# Altium PCB PCB1.pcbdoc
Units mil, origin at the board's own origin, x right, y up, seen from the top; angles counter-clockwise.
Board outline 2715 x 3300 mil, 2 copper layers (Top Layer, Bottom Layer); 53 components, 54 nets, 213 pads, 50 vias.
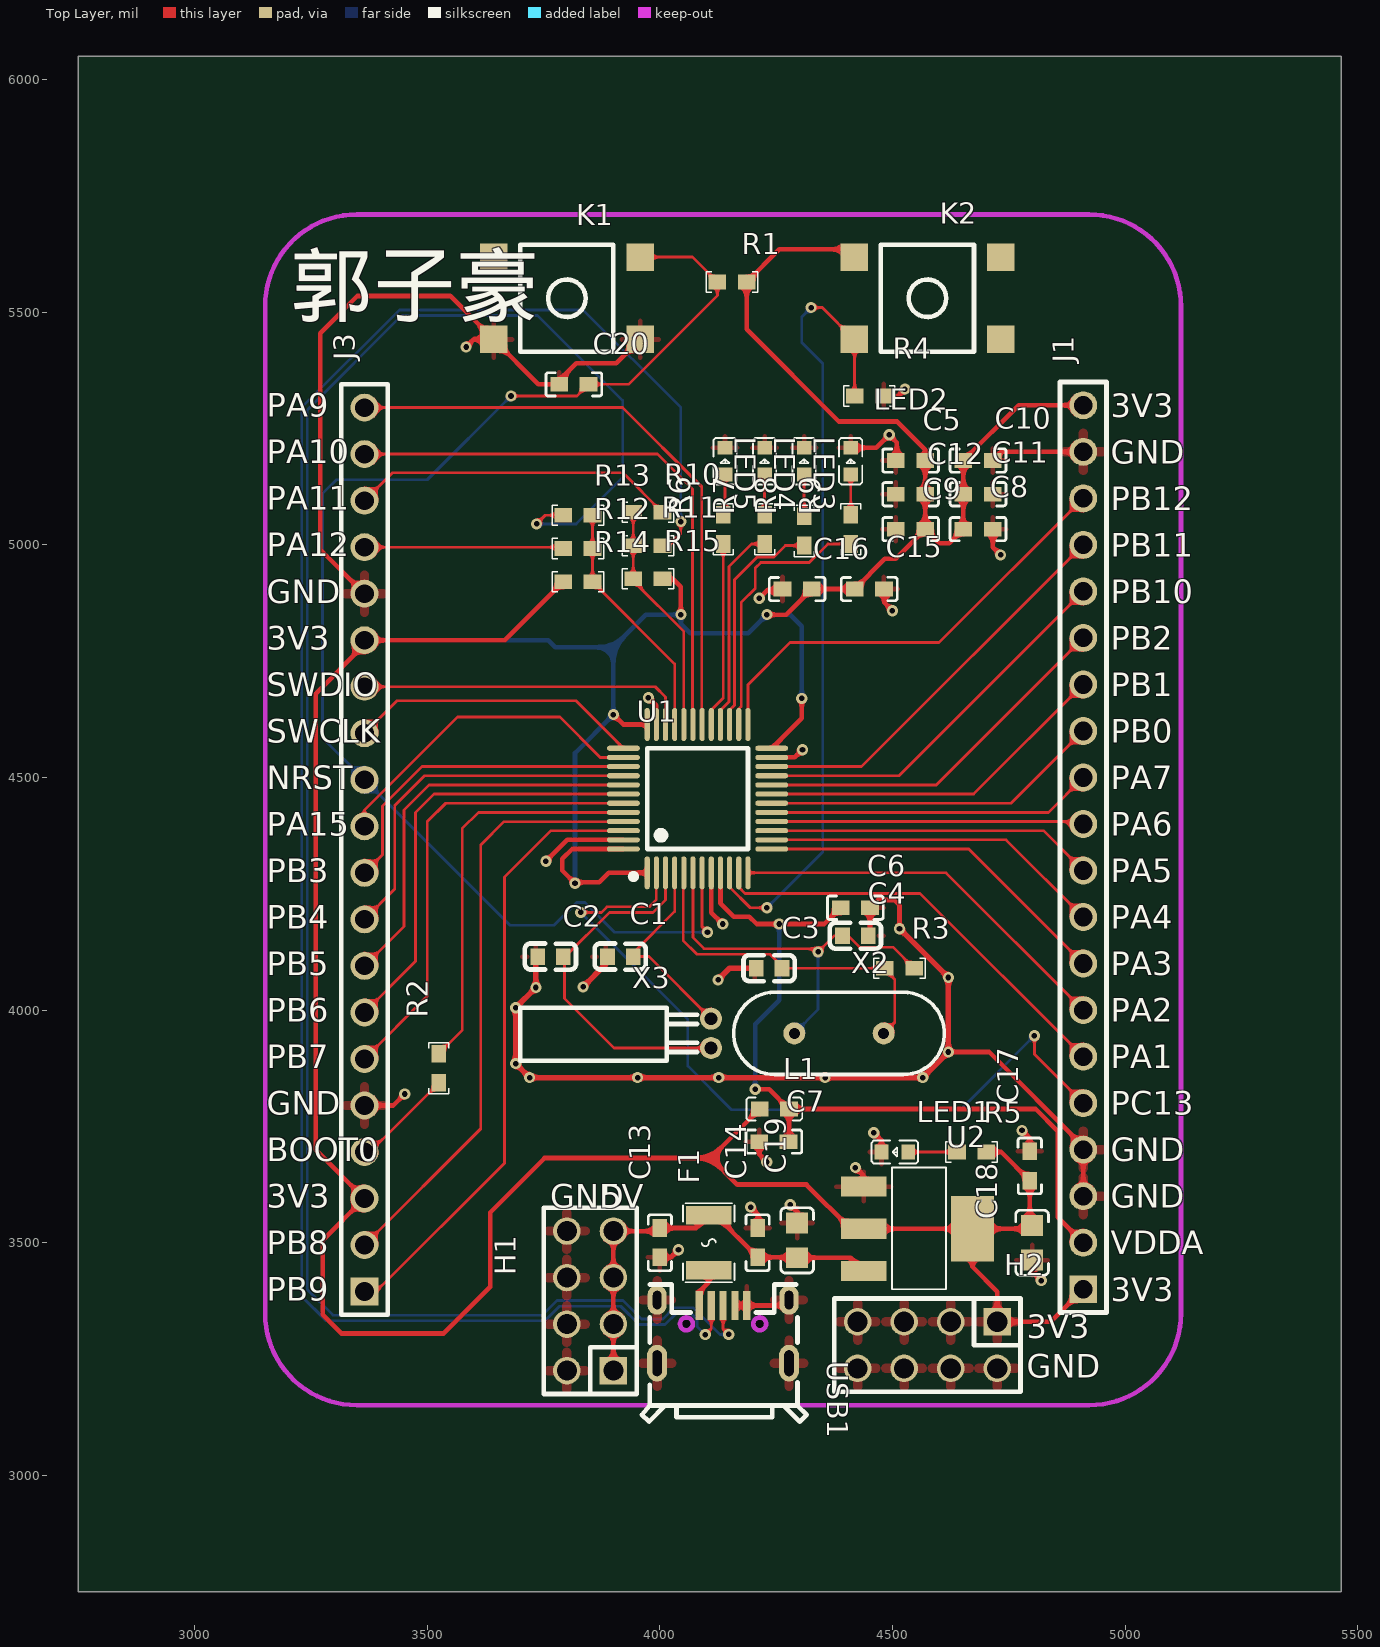
[diagram p0: Top Layer view]
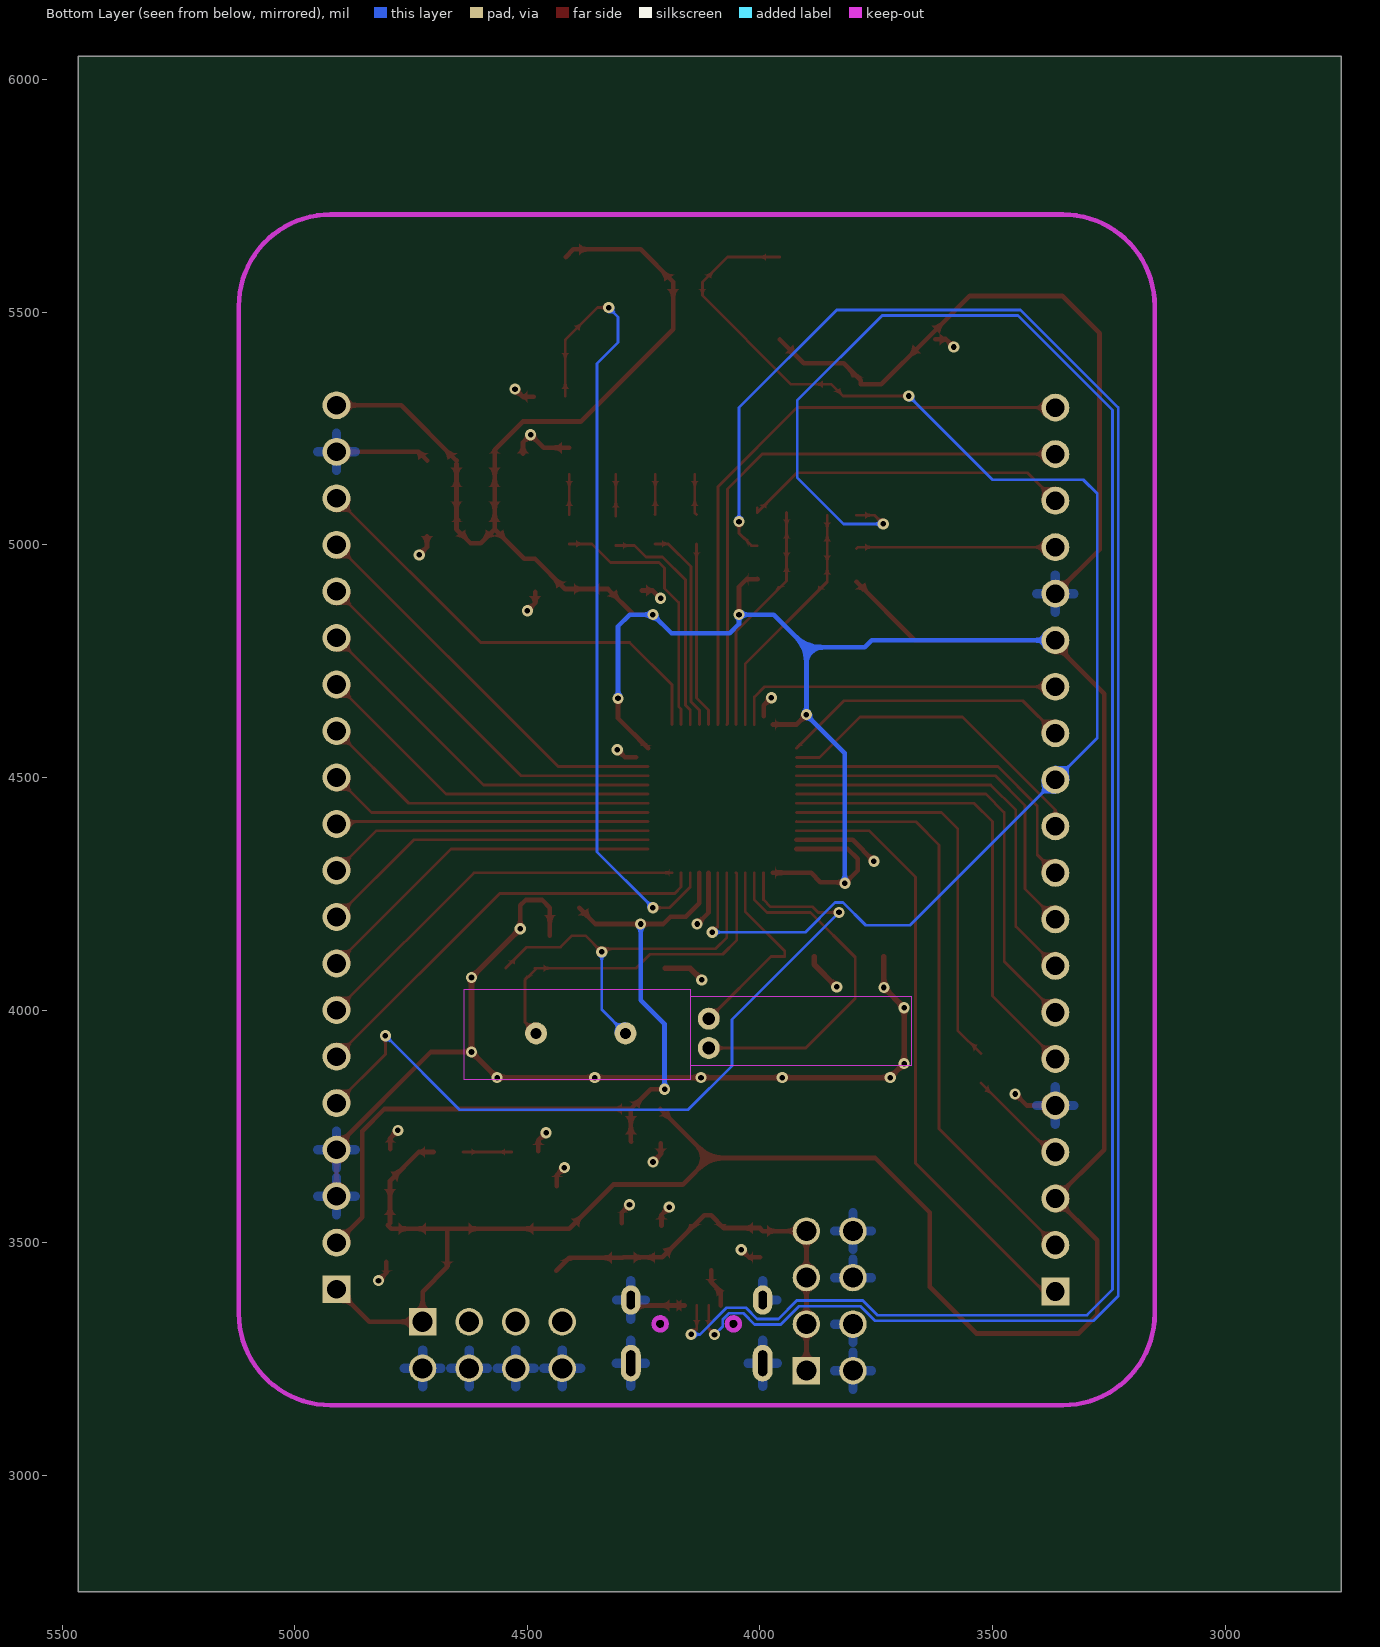
[diagram p1: Bottom Layer view, seen from below]

## Layer stack, top to bottom
Top Layer: signal copper (thickness not stored)
Dielectric: dielectric 12.6, FR-4, Dk 4.8
Bottom Layer: signal copper (thickness not stored)

## Board outline
5465,2750 2750,2750 2750,6050 5465,6050

## Design rules (kind name [scope] priority, off if disabled: settings)
Clearance copperThickness1oz [All] p1: gap=7 ignorepadtopadclearanceinfootprint=FALSE except(6: Track-Track Track-SMDPad SMDPad-SMDPad Track-THPad SMDPad-THPad THPad-THPad Track-Via SMDPad-Via THPad-Via Via-Via SMDPad-Fill THPad-Fill Via-Fill Fill-Fill Track-Region SMDPad-Region THPad-Region Via-Region Region-Region Track-Poly SMDPad-Poly THPad-Poly Via-Poly Fill-Poly Region-Poly Poly-Poly Track-Text SMDPad-Text THPad-Text Via-Text Fill-Text Region-Text Poly-Text Text-Text; 6.9: Track-Hole SMDPad-Hole THPad-Hole Via-Hole Fill-Hole Region-Hole Poly-Hole Text-Hole Sheet-Hole; 11.8: Track-Fill Fill-Region Track-Sheet SMDPad-Sheet THPad-Sheet Via-Sheet Fill-Sheet Region-Sheet Poly-Sheet Text-Sheet)
Clearance copperThickness2oz [All] p1: gap=7 ignorepadtopadclearanceinfootprint=FALSE except(6: Track-SMDPad SMDPad-SMDPad Track-THPad SMDPad-THPad THPad-THPad Track-Via SMDPad-Via THPad-Via Via-Via SMDPad-Fill THPad-Fill Via-Fill Fill-Fill Track-Region SMDPad-Region THPad-Region Via-Region Region-Region Track-Poly SMDPad-Poly THPad-Poly Via-Poly Fill-Poly Region-Poly Poly-Poly Track-Text SMDPad-Text THPad-Text Via-Text Fill-Text Region-Text Poly-Text Text-Text; 6.9: Track-Hole SMDPad-Hole THPad-Hole Via-Hole Fill-Hole Region-Hole Poly-Hole Text-Hole Sheet-Hole; 8: Track-Track; 11.8: Track-Fill Fill-Region Track-Sheet SMDPad-Sheet THPad-Sheet Via-Sheet Fill-Sheet Region-Sheet Poly-Sheet Text-Sheet)
DiffPairsRouting differentialPair [All] p1: maxuncoupledlength=10 maxlimit=6 mostfreqgap=6 toplayer_minwidth=6 toplayer_prefwidth=6 toplayer_maxwidth=6 bottomlayer_minwidth=6 bottomlayer_prefwidth=6 bottomlayer_maxwidth=6
PasteMaskExpansion pasteMaskExpansion [All] p1:
PlaneConnect innerPlane [All] p1: planeconnectstyle=Relief reliefexpansion=20 reliefentries=4 reliefconductorwidth=10 reliefairgap=10
PolygonConnect copperRegion [All] p1: connectstyle=Relief reliefentries=4 reliefconductorwidth=10 polygonreliefangle="90 Angle" airgapwidth=10
RoutingVias viaSize [All] p1: viastyle="Through Hole" holewidth=12 minholewidth=12 maxholewidth=12 width=24 minwidth=24 maxwidth=24
SolderMaskExpansion solderMaskExpansion [All] p1: useseparateexpansions=TRUE expansion=2 expansionbottom=2
Width copperThickness1oz [All] p1: maxlimit=6 minlimit=6 preferedwidth=6
Width copperThickness2oz [All] p1: maxlimit=100 minlimit=8 preferedwidth=10
Width power [All] p1: maxlimit=100 minlimit=5 preferedwidth=10

## Components (designator, comment, footprint, x,y, rotation, side; value= is the part's Value field where it differs from the comment)
C1 "CC0603JRNPO9BN200" C0603#1 3915,4115 r0 top
C2 "CC0603JRNPO9BN200" C0603#1 3765,4115 r0 top
C3 "CC0603JRNPO9BN200" C0603#1 4235,4090 r0 top
C4 "CC0603JRNPO9BN200" C0603#1 4420,4160 r180 top
C5 "CL10A105KB8NNNC" C0603#2 4538.75,5181.25 r0 top
C6 "0603B103K500NT" C0603#2 4420,4220 r180 top
C7 "CL10A105KB8NNNC" C0603#2 4245,3717.31 r0 top
C8 "CL10A105KB8NNNC" C0603#2 4683.75,5033.75 r180 top
C9 "0603B103K500NT" C0603#2 4538.75,5033.75 r0 top
C10 "CL10A105KB8NNNC" C0603#2 4683.75,5181.25 r180 top
C11 "0603B103K500NT" C0603#2 4683.75,5108.75 r180 top
C12 "0603B103K500NT" C0603#2 4538.75,5108.75 r0 top
C13 "CL10A105KB8NNNC" C0603#2 4000,3500 r90 top
C14 "0603B103K500NT" C0603#2 4210,3500 r270 top
C15 "CL10A105KB8NNNC" C0603#2 4450,4905 r180 top
C16 "0603B103K500NT" C0603#2 4295,4905 r0 top
C17 "CAPR500-350X720X850100nF100V" C0603#2 4795,3665 r270 top
C18 "CL21A106KAYNNNE_C15850" C0805 4800,3500 r90 top
C19 "CL21A226MAQNNNE" C0805 4295,3505 r270 top
C20 "CAPR500-350X720X850100nF100V" C0603#2 3815,5345 r0 top
F1 "保险丝" F1210 4105,3500 r90 top
H1 "PZ254V-12-8P" HDR-TH_8P-P2.54-V-M-R2-C4-S2.54 3850,3375 r90 top
H2 "PZ254V-12-8P" HDR-TH_8P-P2.54-V-M-R2-C4-S2.54 4575,3280 r180 top
J1 "J" HDR-TH_20PIN-V-MALE-PITCH2.54 4910,4300 r90 top
J3 "J" HDR-TH_20PIN-V-MALE-PITCH2.54 3365,4295 r90 top
K1 "开关" SW-SMD-T6X6-9.5X5.8 3800,5530 r0 top
K2 "开关" SW-SMD-T6X6-9.5X5.8 4575,5530 r180 top
L1 "3.3uH" L0603 4245.98,3787.44 r0 top
LED1 "LED" LED 4505,3695 r0 top
LED2 "LED" LED 4410,5180 r270 top
LED3 "LED" LED 4310,5180 r270 top
LED4 "LED" LED 4225,5180 r270 top
LED5 "LED" LED 4140,5180 r270 top
R1 "10K" R0603 4155,5565 r0 top
R2 "10K" R0603 3525,3875 r270 top
R3 "1M" R0603 4515,4090 r180 top
R4 "10K" R0603 4450,5320 r180 top
R5 "1K" R0603 4670,3695 r180 top
R6 "1k" R0603 4136.26,5033.45 r90 top
R7 "1k" R0603 4225.61,5033.45 r90 top
R8 "1k" R0603 4310,5030 r90 top
R9 "1k" R0603 4410.06,5033.45 r90 top
R10 "0R" R0603 3974.23,5069.75 r0 top
R11 "NC/22R" R0603 3974.23,4998.27 r0 top
R12 "0R" R0603 3823.74,4992.21 r180 top
R13 "NC/22R" R0603 3823.74,5063.69 r180 top
R14 "NC/1.5k" R0603 3823.74,4920.74 r180 top
R15 "NC/1.5K" R0603 3974.23,4926.8 r0 top
U1 "GD32F103C8T6" TQFP-48_L7.0-W7.0-P0.50-LS9.0-BL 4080.94,4454.53 r0 top
U2 "AMS1117-3.3" SOT-223 4555,3530 r180 top
USB1 "U-F-M5DD-Y-1" U-F-M5DD-Y-1 4135.75,3365 r180 top locked
X2 "8MHz" OSC-49S-1 4385,3950 r0 top
X3 "32.768KHz" DT-38_BD3.1-P0.80 3855,3950 r0 top

## Footprints (in the part's own frame and the unit in brackets; to place one, negate y for a bottom-side part, rotate by r counter-clockwise, add the part's x,y. Pads: shape width x height; smd on the part's side, far side on the other; paste and mask are expansions set on the pad)
C0603#1 [mm]
  rect 0.8x0.9 smd: 1(-0.7,0) 2(0.7,0)
  silkscreen extent -1.41,-0.71 1.39,0.72
C0603#2 [mm]
  rect 0.965x0.8 smd: 1(-0.8,0) 2(0.8,0)
  silkscreen extent -1.52,-0.64 1.52,0.64
C0805 [mm]
  rect 1.14x1.2 smd: 1(-0.95,0) 2(0.95,0)
  silkscreen extent -1.78,-0.89 1.78,0.89
DT-38_BD3.1-P0.80 [mm]
  round 1.2 hole 0.7: 1(6.477,0.8) 2(6.477,-0.8)
  silkscreen extent -3.94,-1.5 5.71,1.4
F1210 [mm]
  rect 1x2.5 smd: 1(-1.5,0) 2(1.5,0)
  silkscreen extent -2.16,-1.4 2.16,1.4
HDR-TH_8P-P2.54-V-M-R2-C4-S2.54 [mm]
  rect 1.5x1.5 hole 1.1: 1(-3.81,-1.27)
  round 1.5 hole 1.1: 2(-3.81,1.27) 3(-1.27,-1.27) 4(-1.27,1.27) 5(1.27,-1.27) 6(1.27,1.27) 7(3.81,-1.27) 8(3.81,1.27)
  silkscreen extent -5.08,-2.54 5.08,2.54
HDR-TH_20PIN-V-MALE-PITCH2.54 [mil]
  rect 60x60 hole 40.16: 1(-900,0)
  round 60 hole 40.16: 2(-800,0) 3(-700,0) 4(-600,0) 5(-500,0) 6(-400,0) 7(-300,0) 8(-200,0) 9(-100,0) 10(0,0) 11(100,0) 12(200,0) 13(300,0) 14(400,0) 15(500,0) 16(600,0) 17(700,0) 18(800,0) 19(900,0) 20(1000,0)
  silkscreen extent -950,-50 1050,50
L0603 [mm]
  rect 0.965x0.8 smd: 1(-0.8,0) 2(0.8,0)
  silkscreen extent -1.52,-0.64 1.52,0.64
LED [mm]
  rect 0.75x0.8 smd: 1(-0.725,0) 2(0.725,0)
  silkscreen extent -1.27,-0.64 1.27,0.64
OSC-49S-1 [mm]
  round 1.2 hole 0.6: 1(-2.44,0) 2(2.44,0)
  silkscreen extent -5.75,-2.25 5.75,2.25
R0603 [mm]
  rect 0.965x0.8 smd: 1(-0.8,0) 2(0.8,0)
  silkscreen extent -1.4,-0.55 1.4,0.55
SOT-223 [mm]
  rect 2.5x1.1 smd: 1(2.97,-2.3) 2(2.97,0) 3(2.97,2.3)
  rect 2.34x3.6 smd: 4(-2.97,0)
  silkscreen extent -1.52,-3.35 1.42,3.3
SW-SMD-T6X6-9.5X5.8 [mm]
  rect 1.5x1.5 smd: 1(-4,2.25) 2(4,2.25) 3(4,-2.25) 4(-4,-2.25)
  silkscreen extent -2.54,-2.92 2.54,2.92
TQFP-48_L7.0-W7.0-P0.50-LS9.0-BL [mm]
  oval 0.28x1.8 smd: 1(-2.75,-4.05) 2(-2.25,-4.05) 3(-1.75,-4.05) 4(-1.25,-4.05) 5(-0.75,-4.05) 6(-0.25,-4.05) 7(0.25,-4.05) 8(0.75,-4.05) 9(1.25,-4.05) 10(1.75,-4.05) 11(2.25,-4.05) 12(2.75,-4.05) 25(2.75,4.05) 26(2.25,4.05) 27(1.75,4.05) 28(1.25,4.05) 29(0.75,4.05) 30(0.25,4.05) 31(-0.25,4.05) 32(-0.75,4.05) 33(-1.25,4.05) 34(-1.75,4.05) 35(-2.25,4.05) 36(-2.75,4.05)
  oval 1.8x0.28 smd: 13(4.05,-2.75) 14(4.05,-2.25) 15(4.05,-1.75) 16(4.05,-1.25) 17(4.05,-0.75) 18(4.05,-0.25) 19(4.05,0.25) 20(4.05,0.75) 21(4.05,1.25) 22(4.05,1.75) 23(4.05,2.25) 24(4.05,2.75) 37(-4.05,2.75) 38(-4.05,2.25) 39(-4.05,1.75) 40(-4.05,1.25) 41(-4.05,0.75) 42(-4.05,0.25) 43(-4.05,-0.25) 44(-4.05,-0.75) 45(-4.05,-1.25) 46(-4.05,-1.75) 47(-4.05,-2.25) 48(-4.05,-2.75)
  silkscreen extent -3.8,-4.55 2.75,2.75
U-F-M5DD-Y-1 [mm]
  rect 0.4x1.6 smd: 1(1.3,0) 2(0.65,0) 3(0,0) 4(-0.65,0) 5(-1.3,0)
  oval 1.05x1.6 hole 0.45 slot 1 at 90 deg: 6(-3.6,-0.3) 8(3.6,-0.3)
  oval 1.09x2 hole 0.5 slot 1.4 at 90 deg: 7(-3.6,3.15) 9(3.6,3.15)
  Multi-Layer board cut-out: 1.65,1 1.698,0.827 1.826,0.7 2,0.654 2.174,0.7 2.302,0.827 2.35,1 2.35,1 2.302,1.173 2.174,1.3 2,1.346 1.826,1.3 1.698,1.173 1.65,1
  Multi-Layer board cut-out: -2.35,1 -2.302,0.826 -2.174,0.7 -2,0.653 -1.826,0.7 -1.698,0.826 -1.65,1 -1.65,1 -1.698,1.174 -1.826,1.3 -2,1.347 -2.174,1.3 -2.302,1.174 -2.35,1
  Multi-Layer keep-out circle w0.254: c2,1 r0.35
  Multi-Layer keep-out circle w0.254: c-2,1 r0.35
  silkscreen extent -4.57,-1.15 4.44,6.35

## Via types
v1: diameter 24, hole 12, Top Layer to Bottom Layer, 50 vias

## Nets (pads, with @x,y where several pads share a name; then routed paths per layer and width w, separated by ;. In a path a pad name is that pad's centre, name@x,y a point inside that pad or via, vN(x,y) a via of type N, cw(c..) or ccw(c..) an arc to the next point about the centre after c; other vN are vias at no path point)
$1N469: LED5.2 R6.2 | length 88.1
  Top Layer w6: R6.2 4140,5068.68 LED5.2
$1N707: LED4.2 R7.2 | length 86.8
  Top Layer w6: LED4.2 4225,5065.55 R7.2
$1N781: LED3.2 R8.2 | length 90
  Top Layer w6: R8.2 LED3.2
$1N855: LED2.2 R9.2 | length 86.5
  Top Layer w6: R9.2@4410,5065 LED2.2
$1N1965: LED1.2 R5.2 | length 105
  Top Layer w6: LED1.2 R5.2
$1N3548: F1.1 USB1.1 | length 84.4
  Top Layer w10: USB1.1 4084.57,3394.34 4105,3414.77 F1.1
$1N6030: R12.1 R13.1 R14.1 U1.33 | length 522.8
  Top Layer w6: R13.1 R12.1 R14.1 4031.73,4744.24 U1.33
$1N6034: R10.1 R11.1 R15.1 U1.32 | length 500.8
  Top Layer w6: R10.1 R11.1 R15.1 3942.73,4922.57 4051.42,4813.89 U1.32
$1N6634: J3.4 R2.2 | length 221.5
  Top Layer w6: J3.4 3376.5,3695 R2.2
BOOT0: R2.1 U1.44 | length 865.2
  Top Layer w6: R2.1 3575,3956.5 3575,4390 3610.01,4425.01 U1.44
D+: R13.2 USB1.3 | length 4243.7
  Top Layer w6: v1(3735,5045) 3753.69,5063.69 R13.2 ; USB1.3 4135.75,3315 v1(4147.87,3302.87)
  Bottom Layer w6: v1(3735,5045) 3820,5045 3920,5145 3920,5310 3737,5493 3445,5493 3242,5290 3242,3399.46 3297.19,3344.26 3747.81,3344.26 3779.07,3375.53 3920.93,3375.53 3960.14,3336.32 4006.31,3336.32 4030.4,3360.41 4071.41,3360.41 4128.95,3302.87 v1(4147.87,3302.87)
D-: R11.2 USB1.2 | length 4243.4
  Top Layer w6: R11.2 4018.27,4998.27 4045,5025 v1(4045,5050) ; v1(4097.58,3302.42) 4110.16,3315 USB1.2
  Bottom Layer w6: v1(4045,5050) 4045,5295 3835,5505 3440.03,5505 3230,5294.97 3230,3385 3282.74,3332.26 3752.78,3332.26 3784.04,3363.53 3915.96,3363.53 3955.17,3324.32 4011.28,3324.32 4035.37,3348.41 4066.44,3348.41 4079.79,3335.07 4079.79,3320.21 v1(4097.58,3302.42)
GND: C1.1 C2.1 C3.1 C4.1 C5.1 C6.1 C7.1 C8.1 C9.1 C10.1 C11.1 C12.1 C13.1 C14.1 C15.1 C16.1 C17.1 C18.1 C19.1 C20.1 H1.2 H1.4 H1.6 H1.8 H2.2 H2.4 H2.6 H2.8 J1.3 J1.4 J1.19 J3.5 J3.16 K1.3 K1.4 LED1.1 LED2.1 LED3.1 LED4.1 LED5.1 R4.1 U1.8 U1.23 U1.35 U1.47 U2.1 USB1.4 USB1.5 USB1.6 USB1.7 USB1.8 USB1.9 | length 5375.8
  Top Layer w10: J3.5 3426.75,3795 v1(3451.5,3819.75) ; J3.16 3270,4990 3270,5455 3350,5535 3548.94,5535 K1.4 3738.94,5345 C20.1 3783.5,5353.5 3820,5390 3906.06,5390 K1.3 ; v1(3583.5,5425.25) 3600,5441.75 K1.4@3623.5,5441.75 ; v1(3755,4320) 3800.95,4365.95 U1.47 ; v1(3975.25,4671.5) 3991.75,4655 U1.35@3991.75,4631.5 ; C13.1 4023.5,3468.5 v1(4040,3485) ; U1.8 4110.47,4209.53 v1(4135,4185) ; USB1.4 USB1.5 4265.67,3365 USB1.6 ; v1(4195.02,3576.5) 4211.52,3560 C14.1@4211.52,3536.5 ; C7.1@4213.25,3713.5 4213.25,3690 v1(4229.75,3673.5) ; v1(4213.5,4885.25) 4230,4901.75 C16.1@4253.5,4901.75 ; U1.23@4266.5,4543.25 4290,4543.25 v1(4306.5,4559.75) ; v1(4280.25,3581.5) 4296.75,3565 C19.1@4296.75,3541.5 ; LED2.1 4464.9,5208.54 v1(4492.86,5236.5) 4509.36,5220 C5.1@4509.36,5196.5 ; v1(4420.25,3661.5) 4436.75,3645 U2.1@4436.75,3621.5 ; C4.1@4451.5,4160 C6.1 4468.15,4236.65 4503.35,4236.65 4515,4225 v1(4515,4175) ; v1(4459.7,3736.5) 4476.19,3720 LED1.1@4476.19,3696.5 ; C15.1@4483.25,4898.5 4483.25,4875 v1(4499.75,4858.5) ; R4.1@4486.5,5318.25 4510,5318.25 v1(4526.5,5334.75) ; v1(4620,3910) 4707.63,3910 4910,3707.63 J1.4 J1.3 ; C10.1 4734,5200 J1.19 ; C8.1@4715.75,5018.5 4715.75,4995 v1(4732.25,4978.5) ; v1(4778.27,3741.5) 4794.76,3725 C17.1@4794.76,3701.5 ; C18.1@4803.25,3458.5 4803.25,3435 v1(4819.75,3418.5)
  Top Layer w12: C2.1@3733.5,4115 v1(3733.5,4048.5) v1(3690,4005) v1(3690,3885) v1(3720,3855) v1(3952.2,3855) v1(4126.67,3855) v1(4355,3855) v1(4565,3855) v1(4620,3910) v1(4620,4070) v1(4515,4175) ; v1(3835,4050) 3883.5,4098.5 C1.1@3883.5,4115 ; v1(4125,4065) 4150,4090 C3.1@4203.5,4090
NRST: C20.2 J3.12 K1.2 R1.1 U1.7 | length 2940.6
  Top Layer w6: v1(3680,5320) 3821.5,5320 C20.2 3932.85,5345 4123.5,5535.66 R1.1 4069.92,5618.58 K1.2 ; U1.7 4090.79,4178.91 v1(4102.35,4167.35)
  Bottom Layer w6: v1(3680,5320) 3500,5140 3305,5140 3275,5110 3275,4585 J3.12 3677.65,4182.35 3772.65,4182.35 3821.3,4231 3838.7,4231 3902.35,4167.35 v1(4102.35,4167.35)
OSC32IN: C2.2 U1.3 X3.2 | length 773.9
  Top Layer w6: U1.3 4012.05,4237.05 3985,4210 3891.5,4210 3795,4113.5 3795,4025 3901.5,3918.5 X3.2
OSC32OUT: C1.2 U1.4 X3.1 | length 434.2
  Top Layer w6: U1.4 4031.73,4211.73 3946.5,4126.5 3946.5,4115 3976.5,4115 X3.1
OSC_IN: C3.2 R3.2 U1.5 X2.2 | length 763.3
  Top Layer w6: U1.5 4050,4293.67 4050,4150 4080,4120 4236.5,4120 4266.5,4090 4479.83,4090 R3.2@4481.67,4088.16 ; X2.2 4505,3973.94 4505,4064.83 R3.2@4481.67,4088.16 ; R3.2 R3.2@4481.67,4088.16
OSC_OUT: 
PA0/WAKEUP: K2.2 R4.2 U1.10 | length 1733.7
  Top Layer w6: U1.10 4149.84,4264.33 4194.17,4220 v1(4230,4220) ; v1@4330,5510 4348.94,5510 K2.2 4418.5,5440.43 R4.2
  Bottom Layer w6: v1(4230,4220) 4350,4340 4350,5390 4305,5435 4305,5490 v1(4325,5510)
PA1: J1.6 U1.11 | length 922.1
  Top Layer w6: U1.11 4169.53,4264.33 4183.2,4250.65 4559.35,4250.65 J1.6
PA2: J1.7 U1.12 | length 843
  Top Layer w6: U1.12 4614.91,4295.09 J1.7
PA3: J1.8 U1.13 | length 771.6
  Top Layer w6: U1.13 4663.73,4346.27 J1.8
PA4: J1.9 U1.14 | length 738.3
  Top Layer w6: U1.14 4744.05,4365.95 J1.9
PA5: J1.10 U1.15 | length 705.1
  Top Layer w6: U1.15 4824.36,4385.64 J1.10
PA6: J1.11 U1.16 | length 671.8
  Top Layer w6: U1.16 4904.68,4405.32 J1.11
PA7: J1.12 U1.17 | length 700.7
  Top Layer w6: U1.17 4835.01,4425.01 J1.12
PA8: R6.1 U1.29 | length 398.6
  Top Layer w6: U1.29 4110.47,4644.74 4136.26,4670.53 R6.1
PA9: J3.20 U1.30 | length 1306.8
  Top Layer w6: J3.20 3920,5295 4090,5125 4090,4614.77 U1.30
PA10: J3.19 U1.31 | length 1242.5
  Top Layer w6: J3.19 3995,5195 4070,5120 4070,4615.08 U1.31
PA11: J3.18 R10.2 | length 710.4
  Top Layer w6: J3.18 3425,5155 3920.47,5155 R10.2 R10.2@4005.72,5079.28
PA12: J3.17 R12.2 | length 428.4
  Top Layer w6: J3.17 3789.46,4995 R12.2
PA15: J3.11 U1.38 | length 710.3
  Top Layer w6: J3.11 3365,4430 3565,4630 3785,4630 3871.88,4543.12 U1.38
PB0: J1.13 U1.18 | length 733.9
  Top Layer w6: U1.18 4754.69,4444.69 J1.13
PB1: J1.14 U1.19 | length 767.2
  Top Layer w6: U1.19 4674.38,4464.38 J1.14
PB2: J1.15 U1.20 | length 800.5
  Top Layer w6: U1.20 4594.06,4484.06 J1.15
PB3: J3.10 U1.39 | length 712.6
  Top Layer w6: J3.10 3404,4334 3404,4439 3488.43,4523.43 U1.39
PB4: J3.9 U1.40 | length 789.8
  Top Layer w6: J3.9 3430,4260 3430,4440 3493.75,4503.75 U1.40
PB5: J3.8 U1.41 | length 864.1
  Top Layer w6: J3.8 3450,4180 3450,4430 3504.06,4484.06 U1.41
PB6: J3.7 U1.42 | length 938.4
  Top Layer w6: J3.7 3475,4105 3475,4425 3514.38,4464.38 U1.42
PB7: J3.6 U1.43 | length 1003.9
  Top Layer w6: J3.6 3500,4030 3500,4405 3539.69,4444.69 U1.43
PB8: J3.2 U1.45 | length 1290.9
  Top Layer w6: J3.2 3615,3745 3615,4355 3665,4405 3921.17,4405 U1.45
PB9: J3.1 U1.46 | length 1327.1
  Top Layer w6: J3.1 3390,3395 3665.76,3670.76 3665.76,4285.76 3765.64,4385.64 U1.46
PB10: J1.16 U1.21 | length 833.7
  Top Layer w6: U1.21 4513.75,4503.75 J1.16
PB11: J1.17 U1.22 | length 867
  Top Layer w6: U1.22 4433.43,4523.43 J1.17
PB12: J1.18 U1.25 | length 972
  Top Layer w6: U1.25 4189.21,4699.21 4280,4790 4600,4790 J1.18
PB13: R9.1 U1.26 | length 577.3
  Top Layer w6: U1.26 4169.53,4647.46 4174.7,4652.63 4174.7,4876.15 4205,4906.45 4205,4950 4216.95,4961.95 4320.92,4961.95 4360.92,5001.95 R9.1
PB14: R8.1 U1.27 | length 495.5
  Top Layer w6: U1.27 4149.84,4644.74 4160.26,4655.16 4160.26,4925 4209.21,4973.95 4245.08,4973.95 4269.63,4998.5 R8.1
PB15: R7.1 U1.28 | length 444.4
  Top Layer w6: U1.28 4130,4614.14 4130,4644.59 4148.26,4662.85 4148.26,4953.26 4196.95,5001.95 R7.1
PC13/TAMPER_RTC: J1.5 U1.2 | length 1695.2
  Top Layer w6: v1(3830,4210) 3874.53,4210 3886.53,4222 3977,4222 3992.36,4237.36 U1.2 ; v1(4805,3945) 4805,3905 J1.5
  Bottom Layer w6: v1(3830,4210) 4060,3980 4060,3880 4154.24,3785.76 4645.76,3785.76 v1(4805,3945)
SWCLK: J3.13 U1.37 | length 627.8
  Top Layer w6: J3.13 3435,4665 3819.3,4665 U1.37
SWDIO: J3.14 U1.34 | length 715.1
  Top Layer w6: J3.14 3990,4695 4012.05,4672.95 U1.34
VCC_3V3: C5.2 C8.2 C9.2 C10.2 C11.2 C12.2 C15.2 C16.2 C17.2 C18.2 H2.1 H2.3 H2.5 H2.7 J1.1 J1.20 J3.3 J3.15 K2.3 L1.1 R1.2 R5.1 R14.2 R15.2 U1.1 U1.24 U1.36 U1.48 U2.2 U2.4 | length 9137.9
  Top Layer w10: R14.2 3792.48,4920.5 3666.98,4795 J3.15 3365,4785 3260,4680 3260,3700 J3.3 3275,3505 3275,3345 3315,3305 3535,3305 3635,3405 3635,3565 3752.07,3682.07 4109.12,3682.07 ; v1(3900,4635) 3921.02,4613.98 U1.36 ; U1.48 3811.27,4346.27 3790,4325 3790,4300 v1(3817.5,4272.5) 3820,4275 3870,4275 3890.09,4295.09 U1.1 ; R15.2 4005,4926.07 4028.93,4926.07 4045,4910 v1(4045,4850) ; L1.1 4109.12,3682.07 ; v1(4230,4850) 4271.5,4850 C16.2 C15.2 4483.5,4970 4506.5,4970 C9.2 ; U1.24 4305,4627.41 v1(4305,4670) ; K2.3 4401.1,5635 4256.5,5635 R1.2 4186.5,5463.5 4385,5265 4510,5265 4570.25,5204.75 C5.2 C12.2 C9.2 ; 4648.77,5053.32 4652.25,5056.81 ; C10.2@4652.25,5173.69 C11.2 4652.25,5056.81 ; C10.2 4771,5300 J1.20 ; R5.1 4733.5,3695 C17.2 4795,3542.4 C18.2 4792.6,3530 U2.4 ; J1.1 4840,3330 H2.1 4725,3395 4671.93,3448.07 U2.4 ; 4109.12,3682.07 4166.19,3625 4315,3625 4410,3530 U2.2 U2.4 ; C9.2 4600.36,5003.63 4622.14,5003.63 C8.2 4652.25,5056.81
  Bottom Layer w10: J3.15 3760,4795 3775,4780 3900,4780 ; v1(3817.5,4272.5) 3817.5,4552.5 v1(3900,4635) 3900,4780 ; v1(4305,4670) 4305,4825 4280,4850 v1(4230,4850) 4190,4810 4065,4810 4045,4830 v1(4045,4850) 3970,4850 3900,4780
VDDA: C6.2 C7.2 J1.2 L1.2 U1.9 | length 1753.5
  Top Layer w10: U1.9 4130.16,4229.84 4159,4201 4192.27,4201 4208.27,4185 v1(4256.36,4185) 4353.5,4185 C6.2 ; v1(4205,3830) 4234.92,3830 L1.2 ; C7.2 4277.48,3718.3 L1.2 ; J1.2 4855,3555 4855,3740 4807.56,3787.44 L1.2
  Bottom Layer w10: v1(4205,3830) 4205,3970 4256.36,4021.36 v1(4256.36,4185)
VIN_5V: C13.2 C14.2 C19.2 F1.2 H1.1 H1.3 H1.5 H1.7 U2.3 | length 901.7
  Top Layer w10: H1.1 H1.3 H1.5 H1.7 3993.5,3525 C13.2 4077.44,3531.5 F1.2 4119.45,3559.06 C14.2 4294.09,3468.5 C19.2 4409.92,3467.6 U2.3
pads on no net: C4.2 K1.1 K2.1 K2.4 R3.1 U1.6 X2.1
copper on no net: | length 867
  Top Layer w6: 4071.1,4295.09 4071.1,4155.9 4095,4132 4333,4132 v1(4340,4125) 4375,4160 4404.02,4160 4428.77,4135.25 4501.24,4135.25 4546.5,4090
  Bottom Layer w6: 4288.94,3950 4340,4001.06 v1(4340,4125)

## Polygon pours and split planes (outlines as drawn)
VCC_3V3 on Top Layer (solid, remove dead copper): 4375,3280 4775,3280 4775,3380 4375,3380
GND on Bottom Layer (solid, remove dead copper, pour order 12): 3000,3000 5215,3000 5215,5795 3000,5795
GND on Top Layer (solid, remove dead copper, pour order 2): 4465.21,5005 4530,5005 4530,5220 4465.21,5220
GND on Top Layer (solid, remove dead copper, pour order 4): 4700,4995 4755,4995 4755,5215 4700,5215
GND on Top Layer (solid, remove dead copper, pour order 6): 4105,5180 4451.35,5180 4451.35,5250 4105,5250
GND on Top Layer (solid, remove dead copper, pour order 8): 4150,3340 4295.75,3340 4295.75,3405 4150,3405
GND on Top Layer (solid, remove dead copper, pour order 10): 3035,3080 5175,3080 5175,5800 3035,5800

## Keep-outs
Bottom Layer:
  region: 3675,3880 4148.83,3880 4148.83,4030 3675,4030
  region: 4150,3850 4635,3850 4635,4045 4150,4045
Board Outline Layer:
  lines w10: 3151.5,3347.8 ccw(c3348.35,3347.8) 3348.35,3150.94 4923.15,3150.94 ccw(c4923.15,3347.8) 5120,3347.8 5120,5513.15 ccw(c4923.15,5513.15) 4923.15,5710 3348.35,5710 ccw(c3348.35,5513.15) 3151.5,5513.15 3151.5,3347.8

## Other copper
Top Layer:
  drawing of 241 lines, arcs and shapes, not listed
Bottom Layer:
  region net NRST: 3396.11,4468.13 3391.87,4463.89 3390.78,4464.74 3389.47,4465.39 3387.95,4465.87 3386.26,4466.18 3382.5,4466.4 3378.39,4466.24 3370.13,4465.42 3366.43,4465.09 3363.33,4465.05 3394.95,4496.67 3394.91,4493.57 3394.58,4489.87 3393.76,4481.61 3393.6,4477.5 3393.82,4473.74 3394.13,4472.05 3394.61,4470.53 3395.26,4469.22
  region net NRST: 3333.89,4521.87 3338.13,4526.11 3339.22,4525.26 3340.53,4524.61 3342.05,4524.13 3343.74,4523.82 3347.5,4523.6 3351.61,4523.76 3359.87,4524.58 3363.57,4524.91 3366.67,4524.95 3335.05,4493.33 3335.09,4496.43 3335.42,4500.13 3336.24,4508.39 3336.4,4512.5 3336.18,4516.26 3335.87,4517.95 3335.39,4519.47 3334.74,4520.78
  region net VCC_3V3: 3406,4800 3406,4790 3403.73,4789.9 3401.76,4789.61 3400.06,4789.14 3398.59,4788.51 3397.31,4787.72 3396.19,4786.8 3394.26,4784.57 3390.54,4779.01 3388.15,4775.88 3386.69,4774.26 3385,4772.64 3385,4817.36 3386.69,4815.74 3388.15,4814.12 3390.54,4810.99 3394.26,4805.43 3396.19,4803.2 3397.31,4802.28 3398.59,4801.49 3400.06,4800.86 3401.76,4800.39 3403.73,4800.1
  region: 4309.64,3974.95 4313.89,3970.71 4312.6,3969.3 4311.63,3967.98 4310.94,3966.74 4310.49,3965.54 4310.26,3964.37 4310.21,3963.22 4310.53,3960.89 4311.9,3955.65 4312.44,3952.45 4312.55,3950.65 4312.52,3948.69 4287.62,3973.59 4289.59,3973.62 4291.39,3973.5 4294.59,3972.97 4299.83,3971.59 4302.16,3971.27 4303.31,3971.32 4304.47,3971.55 4305.67,3972 4306.92,3972.69 4308.24,3973.66
  region: 4343,4108.6 4337,4108.6 4336.87,4110.1 4336.49,4111.33 4335.9,4112.34 4335.14,4113.23 4333.24,4114.91 4331.06,4117 4348.94,4117 4346.76,4114.91 4344.86,4113.23 4344.1,4112.34 4343.51,4111.33 4343.13,4110.1
  region net NRST: 4085.95,4164.35 4085.95,4170.35 4087.45,4170.48 4088.68,4170.86 4089.69,4171.45 4090.57,4172.21 4092.26,4174.11 4094.35,4176.29 4094.35,4158.4 4092.26,4160.59 4090.57,4162.49 4089.69,4163.25 4088.68,4163.84 4087.45,4164.22
  region net PC13/TAMPER_RTC: 4795.52,3931.28 4791.28,3935.52 4792.25,3936.68 4792.85,3937.81 4793.15,3938.95 4793.24,3940.11 4793.09,3942.65 4793.02,3945.67 4805.67,3933.02 4802.65,3933.09 4800.11,3933.24 4798.95,3933.15 4797.81,3932.85 4796.68,3932.25
  region net D+: 4131.47,3299.87 4131.47,3305.87 4132.98,3306.01 4134.2,3306.38 4135.21,3306.97 4136.1,3307.73 4137.79,3309.64 4139.87,3311.82 4139.87,3293.93 4137.79,3296.11 4136.1,3298.02 4135.21,3298.78 4134.2,3299.36 4132.98,3299.74
  region net VDDA: 4261.36,4168.6 4251.36,4168.6 4251.27,4169.72 4251.02,4170.85 4250.13,4173.08 4248.87,4175.17 4247.42,4177 4265.31,4177 4263.86,4175.17 4262.59,4173.08 4261.7,4170.85 4261.45,4169.72
  region net VDDA: 4200,3846.4 4210,3846.4 4210.09,3845.28 4210.34,3844.15 4211.23,3841.92 4212.5,3839.83 4213.94,3838 4196.06,3838 4197.5,3839.83 4198.77,3841.92 4199.66,3844.15 4199.91,3845.28
  region net VCC_3V3: 4028.6,4845 4028.6,4855 4029.72,4855.09 4030.85,4855.34 4033.08,4856.23 4035.17,4857.5 4037,4858.94 4037,4841.06 4035.17,4842.5 4033.08,4843.77 4030.85,4844.66 4029.72,4844.91
  region net VCC_3V3: 4050,4833.6 4040,4833.6 4039.91,4834.72 4039.66,4835.85 4038.77,4838.08 4037.5,4840.17 4036.06,4842 4053.94,4842 4052.5,4840.17 4051.23,4838.08 4050.34,4835.85 4050.09,4834.72
  region net VCC_3V3: 4246.4,4855 4246.4,4845 4245.28,4844.91 4244.15,4844.66 4241.92,4843.77 4239.83,4842.5 4238,4841.06 4238,4858.94 4239.83,4857.5 4241.92,4856.23 4244.15,4855.34 4245.28,4855.09
  region net VCC_3V3: 4221.94,4834.87 4214.87,4841.94 4215.6,4842.79 4216.22,4843.77 4217.17,4845.98 4217.75,4848.35 4218.02,4850.67 4230.67,4838.02 4228.35,4837.75 4225.98,4837.17 4223.77,4836.22 4222.79,4835.6
  region net VCC_3V3: 3895,4651.4 3905,4651.4 3905.09,4650.28 3905.34,4649.15 3906.23,4646.92 3907.5,4644.83 3908.94,4643 3891.06,4643 3892.5,4644.83 3893.77,4646.92 3894.66,4649.15 3894.91,4650.28
  region net VCC_3V3: 3891.94,4619.87 3884.87,4626.94 3885.6,4627.79 3886.22,4628.77 3887.17,4630.98 3887.75,4633.35 3888.02,4635.67 3900.67,4623.02 3898.35,4622.75 3895.98,4622.17 3893.77,4621.22 3892.79,4620.6
  region net VCC_3V3: 4300,4686.4 4310,4686.4 4310.09,4685.28 4310.34,4684.15 4311.23,4681.92 4312.5,4679.83 4313.94,4678 4296.06,4678 4297.5,4679.83 4298.77,4681.92 4299.66,4684.15 4299.91,4685.28
  region net VCC_3V3: 3812.5,4288.9 3822.5,4288.9 3822.59,4287.78 3822.84,4286.65 3823.73,4284.42 3825,4282.33 3826.44,4280.5 3808.56,4280.5 3810,4282.33 3811.27,4284.42 3812.16,4286.65 3812.41,4287.78
  region net PA0/WAKEUP: 4239.48,4233.72 4243.72,4229.48 4242.75,4228.32 4242.15,4227.19 4241.85,4226.05 4241.76,4224.89 4241.91,4222.35 4241.98,4219.33 4229.33,4231.98 4232.35,4231.91 4234.89,4231.76 4236.05,4231.85 4237.19,4232.15 4238.32,4232.75
  region net PA0/WAKEUP: 4315.52,5496.28 4311.28,5500.52 4312.25,5501.68 4312.85,5502.81 4313.15,5503.95 4313.24,5505.11 4313.09,5507.65 4313.02,5510.67 4325.67,5498.02 4322.65,5498.09 4320.11,5498.24 4318.95,5498.15 4317.81,5497.85 4316.68,5497.25
  region net D-: 4042,5066.4 4048,5066.4 4048.13,5064.9 4048.51,5063.67 4049.1,5062.66 4049.86,5061.77 4051.76,5060.09 4053.94,5058 4036.06,5058 4038.24,5060.09 4040.14,5061.77 4040.9,5062.66 4041.49,5063.67 4041.87,5064.9
  region net D+: 3751.4,5048 3751.4,5042 3749.9,5041.87 3748.67,5041.49 3747.66,5040.9 3746.77,5040.14 3745.09,5038.24 3743,5036.06 3743,5053.94 3745.09,5051.76 3746.77,5049.86 3747.66,5049.1 3748.67,5048.51 3749.9,5048.13
  region net NRST: 3670.52,5306.28 3666.28,5310.52 3667.25,5311.68 3667.85,5312.81 3668.15,5313.95 3668.24,5315.11 3668.09,5317.65 3668.02,5320.67 3680.67,5308.02 3677.65,5308.09 3675.11,5308.24 3673.95,5308.15 3672.81,5307.85 3671.68,5307.25
  region net VCC_3V3: 3905,4747.93 cw(c3977.43,4747.93) 3926.21,4799.14 3919.14,4806.21 cw(c3867.93,4857.43) 3867.93,4785 3865,4775 cw(c3865,4745) 3895,4745

## Silkscreen, mask and mechanical layers (free items; w line width, h text height)
Top Silkscreen Layer:
  text "郭子豪" at 3205,5495 h130
  text "PA9" at 3155.5,5275 h50
  text "3V3" at 4969,5274.74 h50
  text "PA10" at 3155.5,5175 h50
  text "GND" at 4969,5174.74 h50
  text "PA11" at 3155.5,5075 h50
  text "PB12" at 4969,5074.74 h50
  text "PA12" at 3155.5,4975 h50
  text "PB11" at 4969,4974.74 h50
  text "GND" at 3155.5,4875 h50
  text "PB10" at 4969,4874.74 h50
  text "3V3" at 3155.5,4775 h50
  text "PB2" at 4969,4774.74 h50
  text "SWDIO" at 3155.5,4675 h50
  text "PB1" at 4969,4674.74 h50
  text "SWCLK" at 3155.5,4575 h50
  text "PB0" at 4969,4574.74 h50
  text "NRST" at 3155.5,4475 h50
  text "PA7" at 4969,4474.74 h50
  text "PA15" at 3155.5,4375 h50
  text "PA6" at 4969,4374.74 h50
  text "PB3" at 3155.5,4275 h50
  text "PA5" at 4969,4274.74 h50
  text "PB4" at 3155.5,4175 h50
  text "PA4" at 4969,4174.74 h50
  text "PB5" at 3155.5,4075 h50
  text "PA3" at 4969,4074.74 h50
  text "PB6" at 3155.5,3975 h50
  text "PA2" at 4969,3974.74 h50
  text "PB7" at 3155.5,3875 h50
  text "PA1" at 4969,3874.74 h50
  text "GND" at 3155.5,3775 h50
  text "PC13" at 4969,3774.74 h50
  text "BOOT0" at 3155.5,3675 h50
  text "GND" at 4969,3674.74 h50
  text "3V3" at 3155.5,3575 h50
  text "GND" at 3764,3574.74 h50
  text "5V" at 3874,3574.74 h50
  text "GND" at 4969,3574.74 h50
  text "PB8" at 3155.5,3475 h50
  text "VDDA" at 4969,3474.74 h50
  text "PB9" at 3155.5,3375 h50
  text "3V3" at 4969,3374.74 h50
  text "3V3" at 4789,3294.74 h50
  text "GND" at 4789,3209.74 h50